# Altium PCB PCB1.PcbDoc (part 2 of 3)
Units mm, origin at the board's own origin, x right, y up, seen from the top; angles counter-clockwise.
Board outline 77.5 x 89.25 mm, 4 copper layers (Top Layer, Layer 1, Layer 2, Bottom Layer), stack 0.603 mm thick; 122 components, 112 nets, 561 pads, 302 vias.
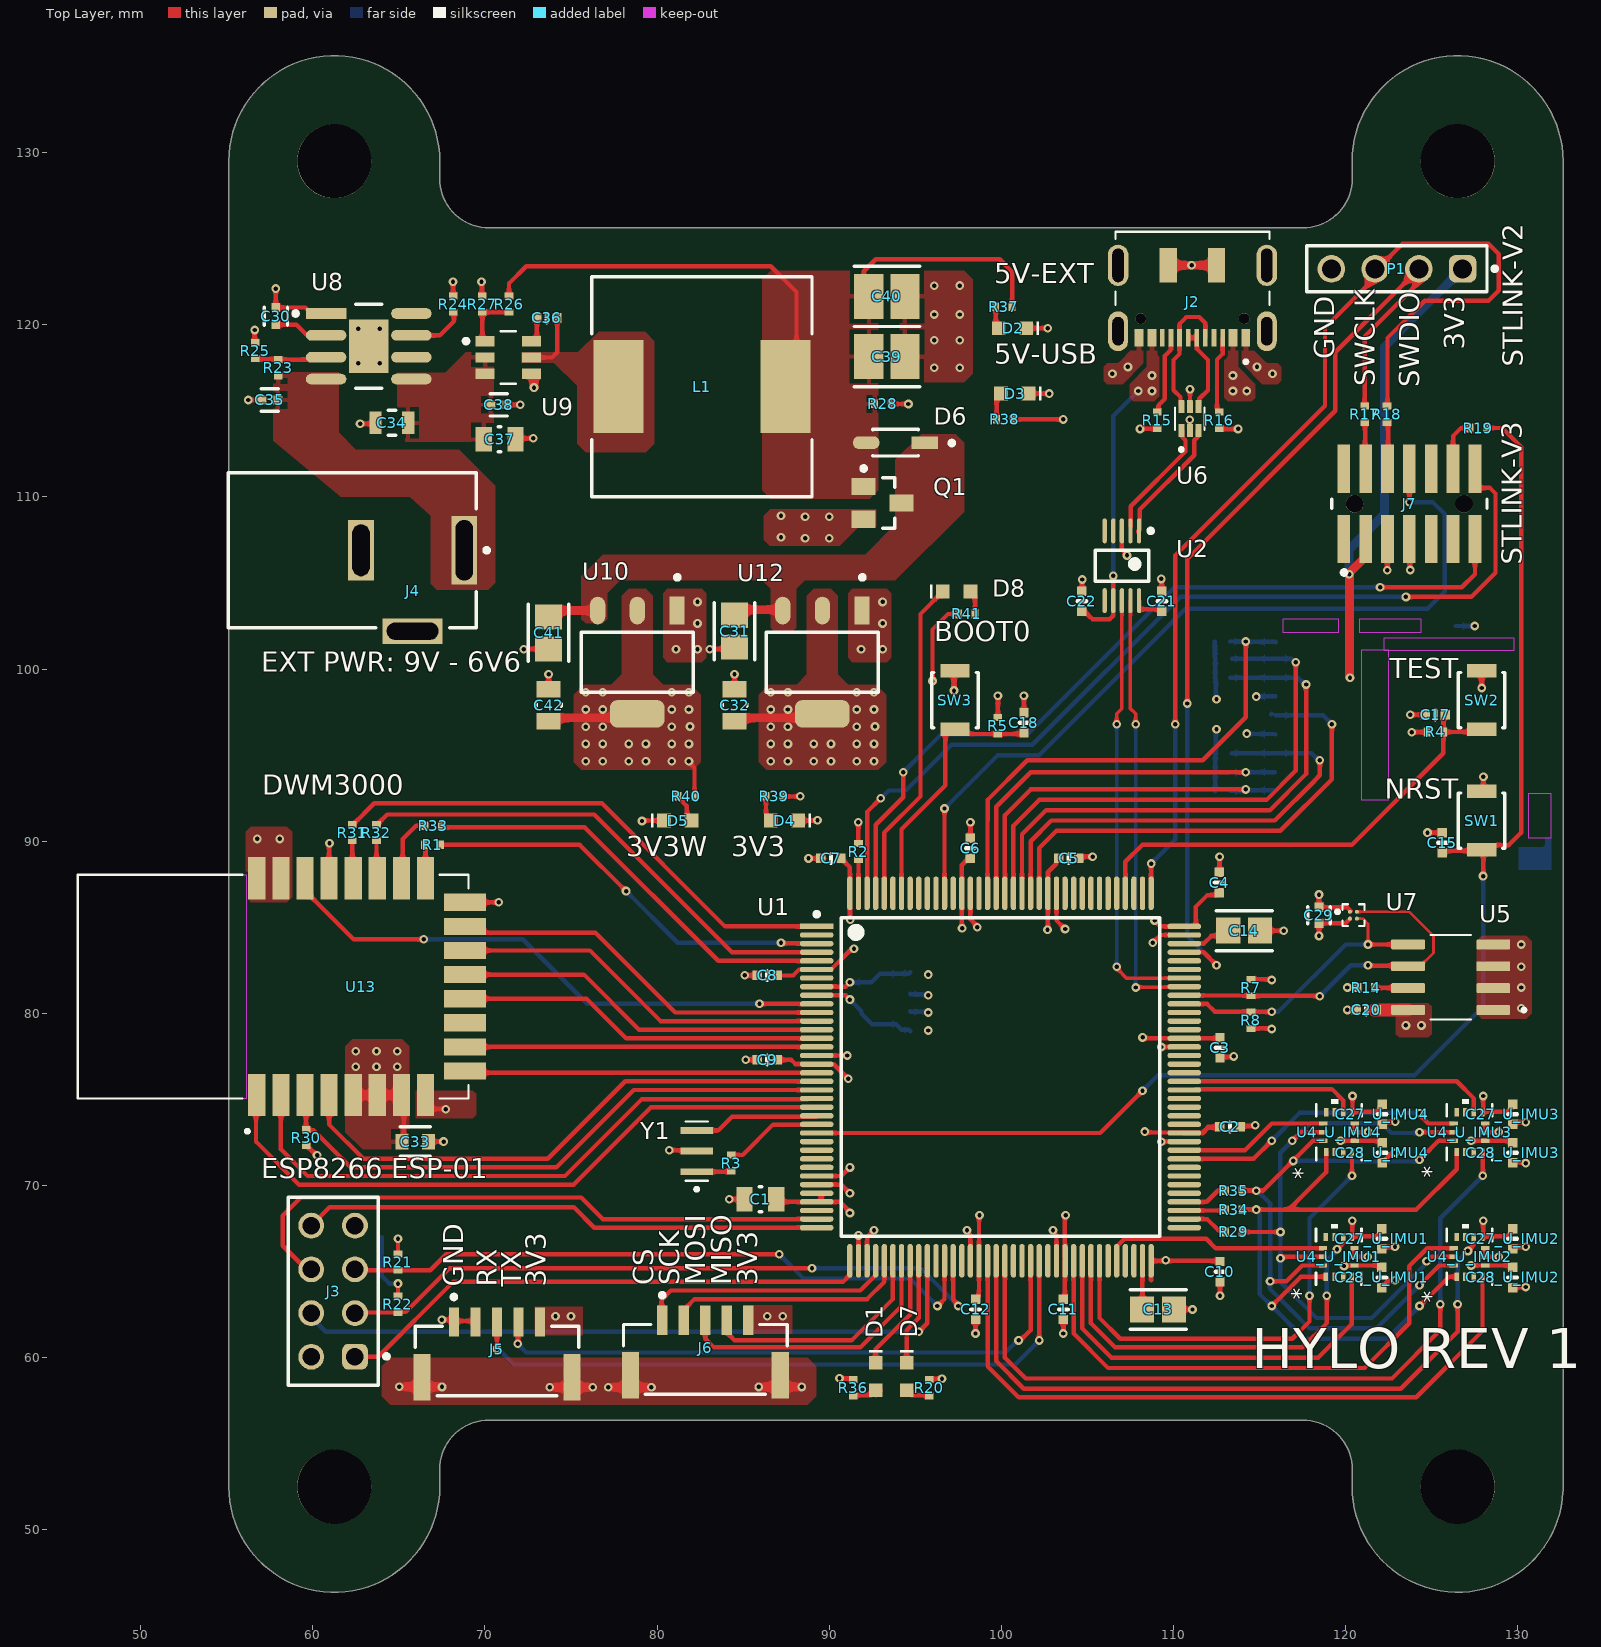
[diagram p0: Top Layer view]

## Via types
v1: diameter 0.508, hole 0.254, Top Layer to Bottom Layer, tented both sides, 302 vias

## Nets (pads, with @x,y where several pads share a name; then routed paths per layer and width w, separated by ;. In a path a pad name is that pad's centre, name@x,y a point inside that pad or via, vN(x,y) a via of type N, cw(c..) or ccw(c..) an arc to the next point about the centre after c; other vN are vias at no path point) (continued)
3V3: (continued)
  Top Layer w0.254: C1.1@86.586,69.2 86.736,69.05 U1.33@89.53,69.05 ; C9.1@86.984,77.3 87.784,77.3 88.034,77.05 U1.17@89.275,77.05 89.286,77.039 90.261,77.039 v1(91.1,76.2) ; R39.1@87.275,92.6 v1@88.3,92.6 ; 87.334,82.2 87.9,82.2 88.25,82.55 U1.6@89.275,82.55 90.104,82.55 91.304,83.75 v1@91.5,83.75 ; U1.32@89.53,69.55 U1.33@89.53,69.05 ; U1.30@89.53,70.55 90.7,70.55 v1(91.2,71.05) ; v1@90.613,58.788 R36.2@91.387,58.788 ; C7.1@90.684,89 91.2,88.484 U1.144@91.2,86.975 v1@91.2,85.4 ; v1(91.2,68.4) 91.2,68.469 90.619,69.05 U1.33@89.53,69.05 ; v1(91.692,91.1) 91.692,89.875 R2.1@91.7,89.875 ; U1.39@92.2,65.625 92.2,66.983 92.6,67.383 v1(92.6,67.4) ; R20.2@95.8,58.775 96.575,58.775 v1@96.6,58.8 ; v1(96,99.3) 96,102.3 96.9,103.2 R41.2@97.525,103.2 ; SW3.2@97.3,99.9 SW3.2@97.525,100.125 ; v1@97.7,85 U1.131@97.7,86.975 ; U1.131@97.7,87.009 97.7,88.616 C6.1@98.2,89.116 ; C12.1@98.5,63.384 98.7,63.584 U1.52@98.7,65.625 98.7,68.241 v1(98.732,68.273) ; v1(101.309,98.447) 101.309,97.466 C18.2@101.314,97.466 ; v1@102.7,84.8 U1.121@102.7,86.975 102.7,88.2 103.184,88.684 103.184,88.998 C5.1@103.3,89.114 ; U1.62@103.679,65.852 v1@103.679,68.228 ; C11.1@103.689,63.473 U1.62@103.689,65.613 ; v1@108.249,78.551 U1.95@110.625,78.55 ; v1@108.372,73.079 U1.84@110.748,73.079 ; 108.7,64.504 U1.72@108.7,65.625 v1@109.525,65.625 ; v1(108.9,85.4) 108.917,85.4 109.267,85.05 111.273,85.05 111.3,85.077 111.3,86.2 111.968,86.868 112.502,86.868 C4.1@112.65,87.016 ; v1(109.551,65.657) 109.588,65.621 112.664,65.621 C10.1@112.7,65.584 ; U1.95@110.625,78.55 C3.1@112.687,78.55 ; R8.1@114.5,79.125 v1@115.525,79.125 ; R7.1@114.5,81.975 v1@115.575,81.975 ; v1(118.45,84.5) 118.45,85.24 119.99,85.24 U7.B1@120.25,85.5 ; v1(119.7,72.6) U4_U_IMU4.5@120.529,72.6 122.074,72.6 C28_U_IMU4.1@122.114,72.56 ; v1(119.9,65.322) 119.933,65.356 U4_U_IMU1.5@120.514,65.356 122.06,65.356 C28_U_IMU1.1@122.1,65.316 ; v1(120.386,67.956) 120.386,67.236 120.35,67.2 120.35,67.047 121.791,67.047 121.957,67.213 121.957,67.253 122.06,67.356 C27_U_IMU1.1@122.1,67.356 ; v1(120.4,75.2) 120.4,74.48 120.364,74.444 120.364,74.291 121.806,74.291 121.971,74.457 121.971,74.497 122.074,74.6 C27_U_IMU4.1@122.114,74.6 ; 122.46,80.2 122.463,80.197 ; v1(123.754,97.346) C17.1@124.616,97.346 ; U5.8@124.423,80.197 U5.8@124.425,80.195 ; v1(127.286,65.356) U4_U_IMU2.5@128.115,65.356 129.66,65.356 C28_U_IMU2.1@129.7,65.316 ; v1(127.286,72.6) U4_U_IMU3.5@128.115,72.6 129.66,72.6 C28_U_IMU3.1@129.7,72.56 ; v1(127.986,67.956) 127.986,67.236 127.95,67.2 127.95,67.047 129.392,67.047 129.557,67.213 129.557,67.253 129.66,67.356 C27_U_IMU2.1@129.7,67.356 ; v1(127.986,75.2) 127.986,74.48 127.95,74.444 127.95,74.291 129.392,74.291 129.557,74.457 129.557,74.497 129.66,74.6 C27_U_IMU3.1@129.7,74.6
  Top Layer w0.305: v1(97.25,98.75) 97.25,99.85 SW3.2@97.3,99.9 ; U1.84@110.625,73.05 110.627,73.051 111.684,73.051 112.017,73.384 C2.1@112.7,73.384 ; v1(127.9,98.9) SW2.1@127.9,99.9
  Top Layer w0.5: C32.1@85.1,97.163 89.363,97.163 U12.4@89.6,97.4
  Top Layer w0.508: v1(120.25,99.5) 120.229,99.521 120.229,105.471 v1(120.2,105.5) 120.2,105.58 121.044,106.424 121.044,107.449 J7.3@121.16,107.565
  Top Layer w0.762: C20.1@121.663,80.197 122.463,80.197 U5.8@123.623,80.197
  Bottom Layer w0.254: R6.2@112.4,101.6 112.4,100.7 112.425,100.675 R11.2@112.425,100.6 R10.2@112.425,99.525 ; R12.2@112.425,92.9 R9.2@112.425,95.1 ; R10.2@112.425,99.5 R10.2@112.425,99.525 ; R9.2@112.498,95.1 112.383,95.215 112.455,95.215 112.463,95.223 112.463,96.462 v1(112.5,96.5) ; v1(112.5,98.25) 112.463,98.287 112.463,99.437 112.4,99.5 R10.2@112.425,99.525 ; v1(114.25,96.25) 114.275,96.225 115.875,96.225 J1.4@115.9,96.2
  Bottom Layer w0.508: v1(120.2,105.5) 120.2,106.95 122.25,109 122.25,118.71 P1.1@126.79,123.25
  other v1: 96.548,58.78 90.6,58.8 74.1,62.4 75,62.4 86.4,62.4 87.3,62.4 103.732,68.273 108.327,73.132 108.204,78.604 115.7,79.091 123.5,79.3 124.4,79.3 115.7,81.941 91.44,83.752 102.68,84.86 97.717,84.939 91.217,85.439 88.32,92.615 86.6,94.65 87.6,94.65 89.1,94.65 90.1,94.65 91.6,94.65 92.6,94.65 86.6,95.65 87.6,95.65 89.1,95.65 90.1,95.65 91.6,95.65 92.6,95.65 86.6,96.65 87.6,96.65 91.6,96.65 92.662,96.663 86.6,97.65 87.6,97.65 91.6,97.65 92.6,97.65 86.6,98.65 87.6,98.65 91.6,98.65 92.6,98.65